# Altium PCB CLP_000.PcbDoc
Units mm, origin at the board's own origin, x right, y up, seen from the top; angles counter-clockwise.
Board outline 135 x 100 mm, 2 copper layers (Top Layer, Bottom Layer); 164 components, 150 nets, 661 pads, 0 vias.
Unrouted connection lines stored in the file: 390.
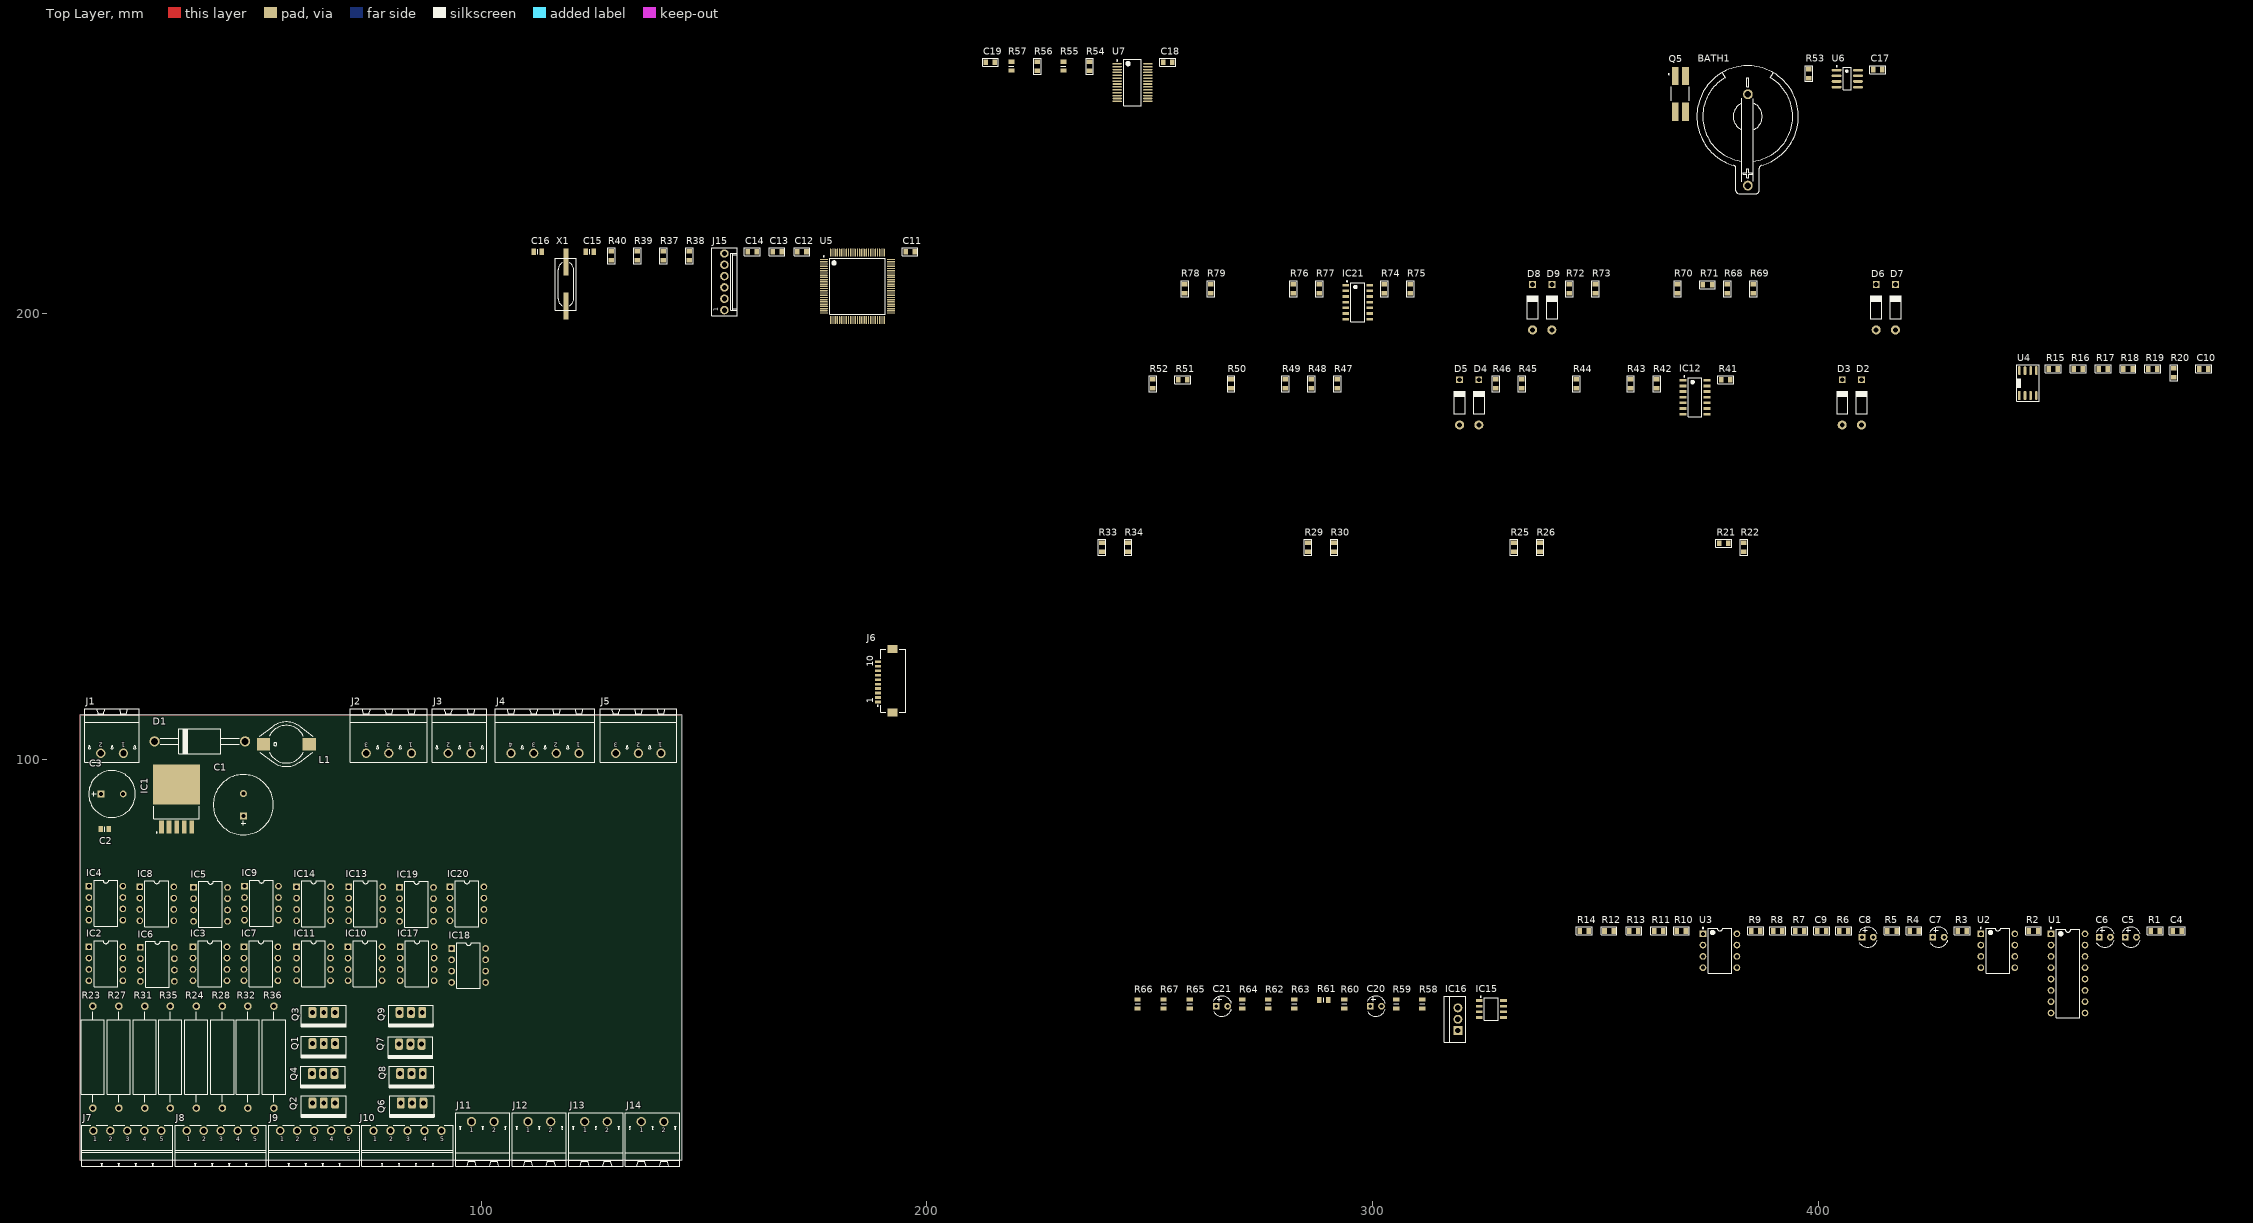
[diagram p0: Top Layer view]
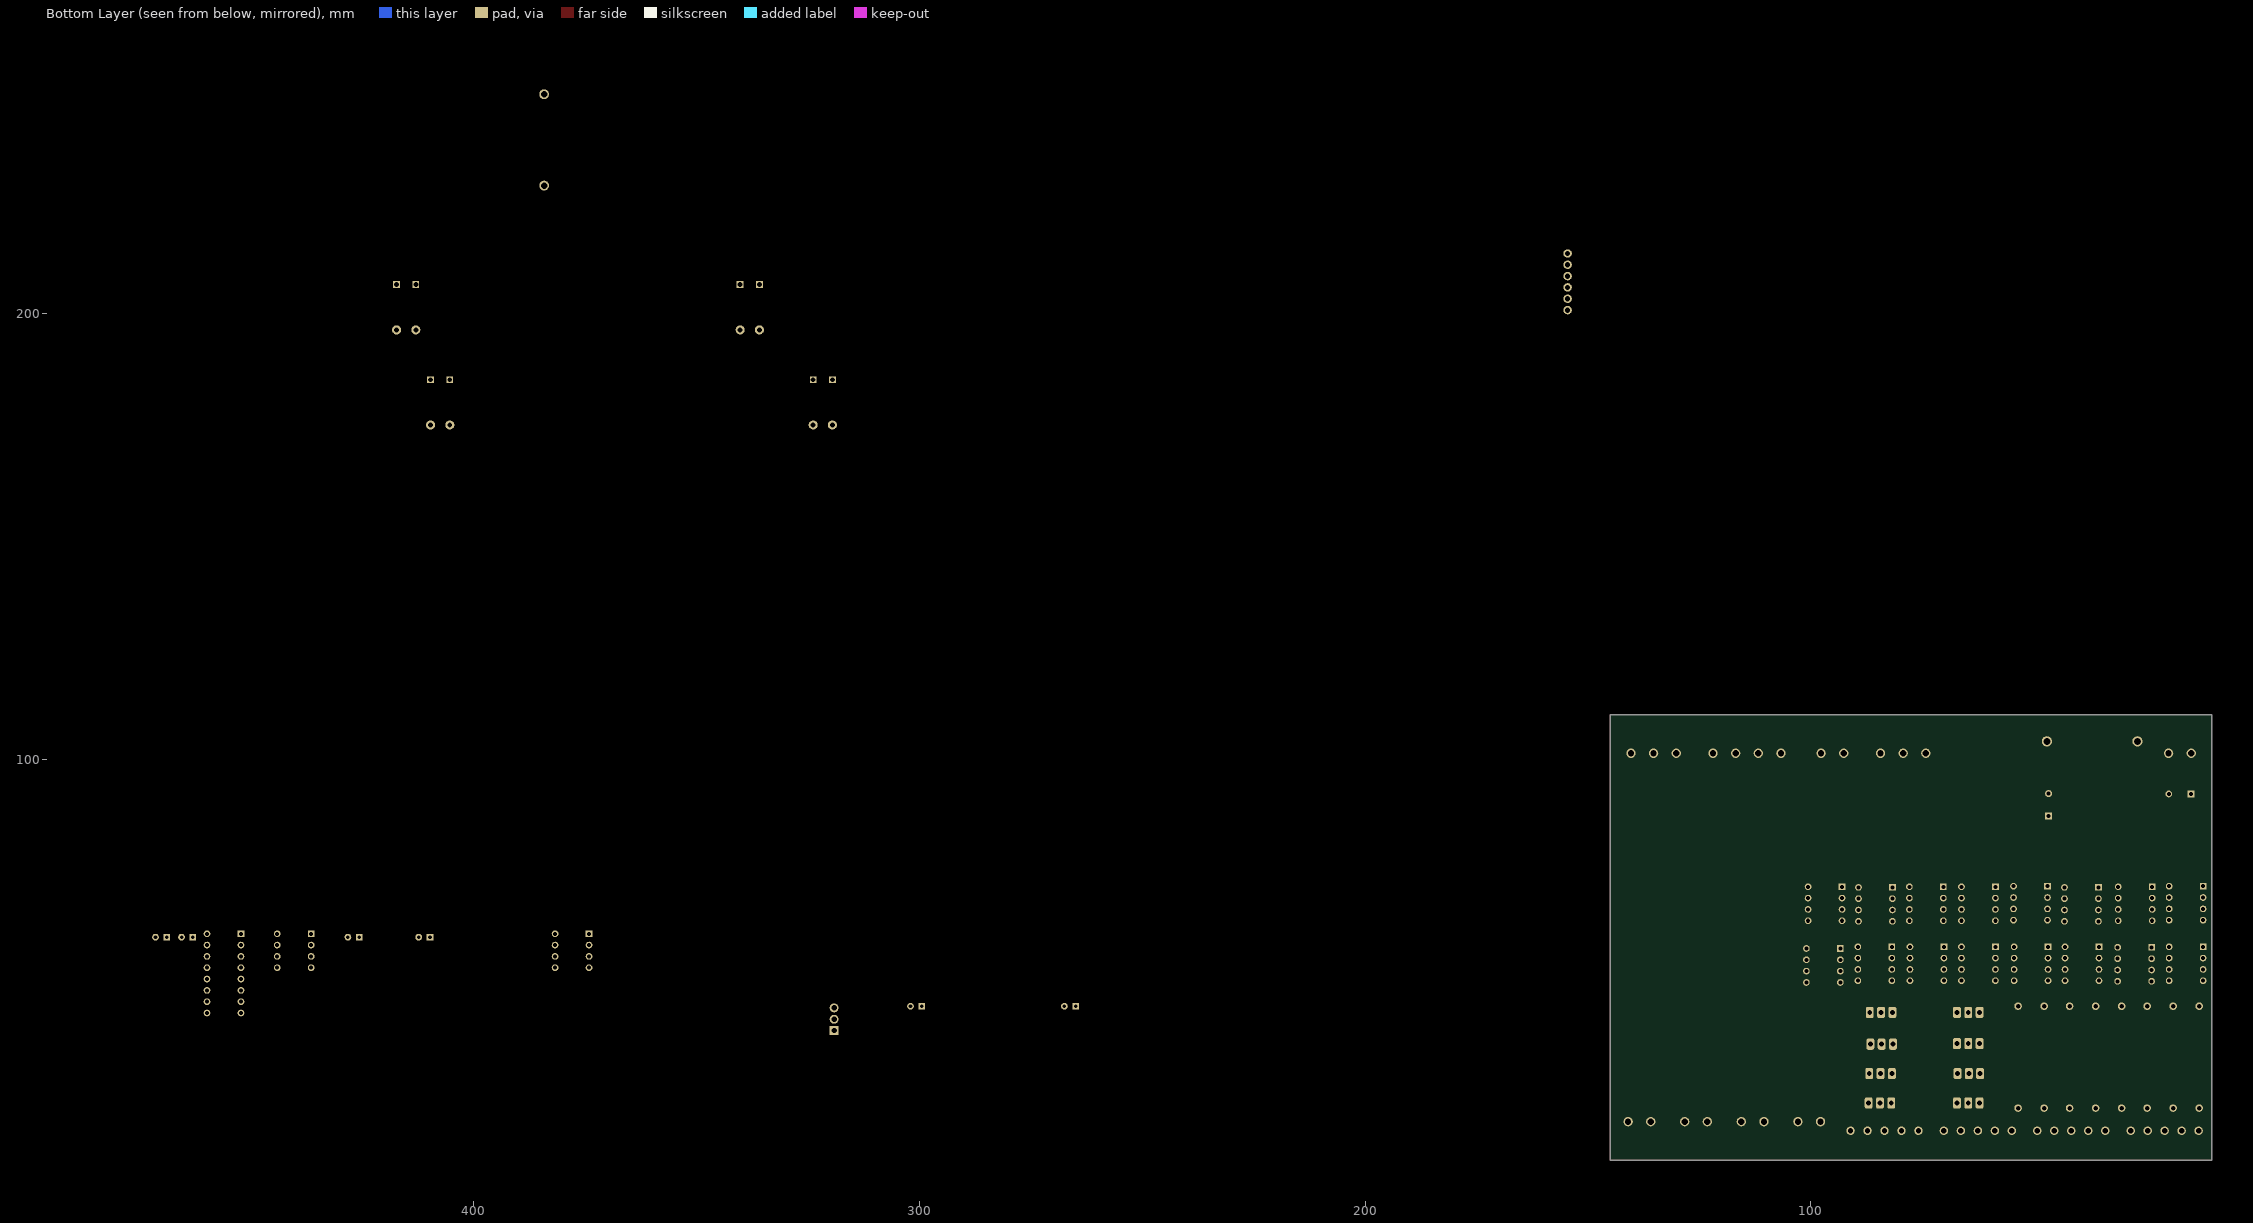
[diagram p1: Bottom Layer view, seen from below]

## Layer stack, top to bottom
Top Layer: signal copper 0.0356
Dielectric: dielectric 0.32, FR-4, Dk 4.8
Bottom Layer: signal copper 0.0356

## Board outline
10,10 145,10 145,110 144.982,109.982 10.033,109.982

## Design rules (kind name [scope] priority, off if disabled: settings)
Clearance [All] p1: gap=0.254
PolygonConnect [All] p1: connectstyle=Relief reliefconductorwidth=0.254 reliefentries=4 polygonreliefangle="90 Angle"
RoomDefinition USB_SERIAL [InComponentClass('USB_SERIAL')] p1: confinementstyle=ConfineIn formatcopy=TRUE lockcomponents=FALSE outline 212.217,246.126 256.667,246.126 256.667,260.096 212.217,260.096
RoomDefinition RTC_ds1307z [InComponentClass('RTC_ds1307z')] p2: confinementstyle=ConfineIn formatcopy=TRUE lockcomponents=FALSE outline 366.014,226.568 416.052,226.568 416.052,258.445 366.014,258.445
RoomDefinition Output_dig [InComponentClass('Output_dig')] p3: confinementstyle=ConfineIn formatcopy=TRUE lockcomponents=FALSE outline 249.555,173.736 411.48,173.736 411.48,188.849 249.555,188.849
RoomDefinition Output_dig2 [InComponentClass('Output_dig2')] p4: confinementstyle=ConfineIn formatcopy=TRUE lockcomponents=FALSE outline 256.667,195.072 419.1,195.072 419.1,210.185 256.667,210.185
RoomDefinition Microcontrolador [InComponentClass('Microcontrolador')] p5: confinementstyle=ConfineIn formatcopy=TRUE lockcomponents=FALSE outline 110.744,197.231 198.374,197.231 198.374,217.551 110.744,217.551
RoomDefinition Input_dig [InComponentClass('Input_dig')] p6: confinementstyle=ConfineIn formatcopy=TRUE lockcomponents=FALSE outline 224.79,124.46 408.305,124.46 408.305,152.146 224.79,152.146
RoomDefinition eeprom24c32 [InComponentClass('eeprom24c32')] p7: confinementstyle=ConfineIn formatcopy=TRUE lockcomponents=FALSE outline 444.246,180.086 489.204,180.086 489.204,191.262 444.246,191.262
RoomDefinition Comu_485 [InComponentClass('Comu_485')] p8: confinementstyle=ConfineIn formatcopy=TRUE lockcomponents=FALSE outline 345.44,41.783 482.6,41.783 482.6,65.151 345.44,65.151
RoomDefinition analog [InComponentClass('analog')] p9: confinementstyle=ConfineIn formatcopy=TRUE lockcomponents=FALSE outline 246.126,36.195 330.581,36.195 330.581,49.657 246.126,49.657
RoutingVias [All] p1: holewidth=0.711 width=1.27 viastyle="Through Hole" minholewidth=0.711 minwidth=1.27 maxholewidth=0.711 maxwidth=1.27
SilkscreenOverComponentPads [All] p1: minsilkscreentomaskgap=0.254
SolderMaskExpansion [All] p1: expansion=0.102
Width [All] p1: maxlimit=0.254 minlimit=0.254 preferedwidth=0.254
27 further rules are at their usual default settings.

## Classes and differential pairs
component class USB_SERIAL: C18 C19 R54 R55 R56 R57 U7
component class RTC_ds1307z: BATH1 C17 Q5 R53 U6
component class Output_dig: D2 D3 D4 D5 IC10 IC11 IC12 IC13 IC14 Q1 Q2 Q3 Q4 R41 R42 R43 R44 R45 R46 R47 R48 R49 R50 R51 R52
component class Output_dig2: D6 D7 D8 D9 IC17 IC18 IC19 IC20 IC21 Q6 Q7 Q8 Q9 R68 R69 R70 R71 R72 R73 R74 R75 R76 R77 R78 R79
component class Microcontrolador: C11 C12 C13 C14 C15 C16 J15 R37 R38 R39 R40 U5 X1
component class Input_dig: IC2 IC3 IC4 IC5 IC6 IC7 IC8 IC9 R21 R22 R23 R24 R25 R26 R27 R28 R29 R30 R31 R32 R33 R34 R35 R36
component class eeprom24c32: C10 R15 R16 R17 R18 R19 R20 U4
component class conn: J1 J2 J3 J4 J5 J6 J7 J8 J9 J10 J11 J12 J13 J14
component class Comu_485: C4 C5 C6 C7 C8 C9 R1 R2 R3 R4 R5 R6 R7 R8 R9 R10 R11 R12 R13 R14 U1 U2 U3
component class analog: C20 C21 IC15 IC16 R58 R59 R60 R61 R62 R63 R64 R65 R66 R67
component class Alimentacao: C1 C2 C3 D1 IC1 L1

## Components (designator, comment, footprint, x,y, rotation, side; value= is the part's Value field where it differs from the comment)
BATH1 "Value" BATH_KEYSTONE_103 384.175,244.221 r90 top
C1 "1000uF" CAPPR500-1350X2200 46.609,89.789 r90 top
C2 "100nF" CAPC2012X135N 15.494,84.328 r180 top
C3 "100uF" CAPPR500-1050X1750 17.145,92.202 r0 top
C4 "100nF" 0805C-TBD 479.806,61.468 r0 top
C5 "1uF" CAPPRB254-450X710 470.154,60.071 r0 top
C6 "1uF" CAPPRB254-450X710 464.312,60.071 r0 top
C7 "1uF" CAPPRB254-450X710 426.974,60.071 r0 top
C8 "1uF" CAPPRB254-450X710 411.099,60.071 r0 top
C9 "100nF" 0805C-TBD 400.05,61.468 r0 top
C10 "100nF" 0805C-TBD 485.775,187.579 r0 top
C11 "100nF" 0805C-TBD 195.453,213.868 r0 top
C12 "100nF" 0805C-TBD 171.196,213.868 r0 top
C13 "100nF" 0805C-TBD 165.608,213.868 r0 top
C14 "100nF" 0805C-TBD 160.02,213.868 r0 top
C15 "22pF" CAPC2012X135N 124.333,213.868 r0 top
C16 "22pF" CAPC2012X135N 112.649,213.868 r0 top
C17 "100nF" 0805C-TBD 412.623,254.762 r0 top
C18 "100nF" 0805C-TBD 253.238,256.413 r0 top
C19 "100nF" 0805C-TBD 213.487,256.413 r0 top
C20 "1uF" CAPPRB254-450X710 300.736,44.577 r0 top
C21 "1uF" CAPPRB254-450X710 266.192,44.577 r0 top
D1 "1N5822" DO-201AD 36.83,104.013 r0 top
D2 "DIODO 1N4007 PF-B1" "DIODO DO41 PF-B1" 409.702,185.166 r0 top
D3 "DIODO 1N4007 PF-B1" "DIODO DO41 PF-B1" 405.384,185.166 r0 top
D4 "DIODO 1N4007 PF-B1" "DIODO DO41 PF-B1" 323.85,185.166 r0 top
D5 "DIODO 1N4007 PF-B1" "DIODO DO41 PF-B1" 319.532,185.166 r0 top
D6 "DIODO 1N4007 PF-B1" "DIODO DO41 PF-B1" 413.004,206.502 r0 top
D7 "DIODO 1N4007 PF-B1" "DIODO DO41 PF-B1" 417.322,206.502 r0 top
D8 "DIODO 1N4007 PF-B1" "DIODO DO41 PF-B1" 335.915,206.502 r0 top
D9 "DIODO 1N4007 PF-B1" "DIODO DO41 PF-B1" 340.233,206.502 r0 top
IC1 "LT1764AEQ-3.3#PBF" TO170P1394X457-6N-R900X1060 31.623,91.059 r90 top
IC2 "HCPL-2601-000E" DIP8-300 15.748,54.102 r0 top
IC3 "HCPL-2601-000E" DIP8-300 39.116,54.102 r0 top
IC4 "HCPL-2601-000E" DIP8-300 15.748,67.691 r0 top
IC5 "HCPL-2601-000E" DIP8-300 39.243,67.437 r0 top
IC6 "HCPL-2601-000E" DIP8-300 27.305,53.975 r0 top
IC7 "HCPL-2601-000E" DIP8-300 50.546,54.102 r0 top
IC8 "HCPL-2601-000E" DIP8-300 27.178,67.564 r0 top
IC9 "HCPL-2601-000E" DIP8-300 50.673,67.691 r0 top
IC10 "HCPL-2601-000E" DIP8-300 73.914,54.102 r0 top
IC11 "HCPL-2601-000E" DIP8-300 62.357,54.102 r0 top
IC12 "SN74LS04D" SOIC127P600X175-14N 372.364,181.229 r0 top
IC13 "HCPL-2601-000E" DIP8-300 74.041,67.564 r0 top
IC14 "HCPL-2601-000E" DIP8-300 62.357,67.564 r0 top
IC15 "LM358AD" SOIC127P600X175-8N 326.644,43.942 r0 top
IC16 "LM7812CT" TO-220-V 319.151,41.656 r90 top
IC17 "HCPL-2601-000E" DIP8-300 85.598,54.102 r0 top
IC18 "HCPL-2601-000E" DIP8-300 97.155,53.721 r0 top
IC19 "HCPL-2601-000E" DIP8-300 85.471,67.437 r0 top
IC20 "HCPL-2601-000E" DIP8-300 96.774,67.564 r0 top
IC21 "SN74LS04D" SOIC127P600X175-14N 296.672,202.565 r0 top
J1 "Family" PHOENIX_1757242 17.145,101.346 r180 top
J2 "Family" PHOENIX_1757255 79.248,101.346 r180 top
J3 "Family" PHOENIX_1757242 95.123,101.346 r180 top
J4 "Family" PHOENIX_1757268 114.3,101.346 r180 top
J5 "Family" PHOENIX_1757255 135.255,101.346 r180 top
J6 "CL586-0541-8" FH12-22(10)SA-1SH 190.627,117.602 r90 top
J7 "Family" PHOENIX_1803303 20.574,16.637 r0 top
J8 "Family" PHOENIX_1803303 41.529,16.637 r0 top
J9 "Family" PHOENIX_1803303 62.484,16.637 r0 top
J10 "Family" PHOENIX_1803303 83.439,16.637 r0 top
J11 "Family" PHOENIX_1757242 100.33,18.669 r0 top
J12 "Family" PHOENIX_1757242 113.03,18.669 r0 top
J13 "Family" PHOENIX_1757242 125.73,18.669 r0 top
J14 "Family" PHOENIX_1757242 138.43,18.669 r0 top
J15 "KK®" MOLEX_22-27-2061 154.559,207.137 r90 top
L1 "100uH" IND_WURTH_WE-PD4_L 56.261,103.378 r0 top
Q1 "TRANSISTOR TIP 122 PF-C2" "TRANSISTOR TO220 PF-C2" 67.183,36.195 r180 top
Q2 "TRANSISTOR TIP 122 PF-C2" "TRANSISTOR TO220 PF-C2" 67.183,22.86 r180 top
Q3 "TRANSISTOR TIP 122 PF-C2" "TRANSISTOR TO220 PF-C2" 67.183,43.18 r180 top
Q4 "TRANSISTOR TIP 122 PF-C2" "TRANSISTOR TO220 PF-C2" 67.056,29.464 r180 top
Q5 "32.768kHz" XTAL_EPSON_MC-406 369.062,249.301 r0 top
Q6 "TRANSISTOR TIP 122 PF-C2" "TRANSISTOR TO220 PF-C2" 86.995,22.86 r180 top
Q7 "TRANSISTOR TIP 122 PF-C2" "TRANSISTOR TO220 PF-C2" 86.614,36.068 r180 top
Q8 "TRANSISTOR TIP 122 PF-C2" "TRANSISTOR TO220 PF-C2" 86.868,29.464 r180 top
Q9 "TRANSISTOR TIP 122 PF-C2" "TRANSISTOR TO220 PF-C2" 86.741,43.18 r180 top
R1 "4K7" 0805R-4K7 474.853,61.468 r0 top
R2 "56" 0805R-56 447.548,61.468 r0 top
R3 "4K7" 0805R-4K7 431.546,61.468 r0 top
R4 "56" 0805R-56 420.751,61.468 r0 top
R5 "4K7" 0805R-4K7 415.798,61.468 r0 top
R6 "56" 0805R-56 405.003,61.468 r0 top
R7 "4K7" 0805R-4K7 395.097,61.468 r0 top
R8 "56" 0805R-56 390.144,61.468 r0 top
R9 "56" 0805R-56 385.191,61.468 r0 top
R10 "56" 0805R-56 368.554,61.468 r0 top
R11 "4K7" 0805R-4K7 363.474,61.468 r0 top
R12 "56" 0805R-56 352.298,61.468 r0 top
R13 "56" 0805R-56 357.886,61.468 r0 top
R14 "4K7" 0805R-4K7 346.71,61.468 r0 top
R15 "0R" 0805R-GENERIC 451.993,187.579 r0 top
R16 "0R" 0805R-GENERIC 457.581,187.579 r0 top
R17 "0R" 0805R-GENERIC 463.169,187.579 r0 top
R18 "0R" 0805R-GENERIC 468.757,187.579 r0 top
R19 "0R" 0805R-GENERIC 474.345,187.579 r0 top
R20 "0R" 0805R-GENERIC 479.806,185.928 r90 top
R21 "330R" 0805R-330 377.825,148.463 r0 top
R22 "330R" 0805R-330 383.286,146.558 r90 top
R23 "4k7" RES2286-1670X520 12.827,33.147 r90 top
R24 "4k7" RES2286-1670X520 36.068,33.147 r90 top
R25 "330R" 0805R-330 331.724,146.558 r90 top
R26 "330R" 0805R-330 337.566,146.558 r90 top
R27 "4k7" RES2286-1670X520 18.669,33.147 r90 top
R28 "4k7" RES2286-1670X520 41.91,33.147 r90 top
R29 "330R" 0805R-330 285.496,146.558 r90 top
R30 "330R" 0805R-330 291.338,146.558 r90 top
R31 "4k7" RES2286-1670X520 24.511,33.147 r90 top
R32 "4k7" RES2286-1670X520 47.625,33.147 r90 top
R33 "330R" 0805R-330 239.268,146.558 r90 top
R34 "330R" 0805R-330 245.11,146.558 r90 top
R35 "4k7" RES2286-1670X520 30.226,33.147 r90 top
R36 "4k7" RES2286-1670X520 53.467,33.147 r90 top
R37 "1K5" 0805R-1K5 140.843,212.217 r90 top
R38 "1K5" 0805R-1K5 146.685,212.217 r90 top
R39 "1K" 0805R-1K 135.001,212.217 r90 top
R40 "10K" 0805R-10K 129.159,211.963 r90 top
R41 "330R" 0805R-330 378.206,185.166 r0 top
R42 "330R" 0805R-330 363.728,183.261 r90 top
R43 "10K" 0805R-10K 357.886,183.261 r90 top
R44 "10K" 0805R-10K 345.694,183.261 r90 top
R45 "10K" 0805R-10K 333.502,183.261 r90 top
R46 "10K" 0805R-10K 327.66,183.261 r90 top
R47 "330R" 0805R-330 292.1,183.261 r90 top
R48 "330R" 0805R-330 286.258,183.261 r90 top
R49 "10K" 0805R-10K 280.416,183.261 r90 top
R50 "10K" 0805R-10K 268.224,183.261 r90 top
R51 "10K" 0805R-10K 256.413,185.166 r0 top
R52 "10K" 0805R-10K 250.698,183.261 r90 top
R53 "0R" 0805R-GENERIC 397.891,253.111 r90 top
R54 "1K" 0805R-1K 236.474,254.762 r90 top
R55 "22" RESC2012X60N 230.632,255.524 r90 top
R56 "1K" 0805R-1K 224.79,254.762 r90 top
R57 "22" RESC2012X60N 218.948,255.524 r90 top
R58 "4k7" RESC2012X60N 311.15,45.085 r90 top
R59 "1k" RESC2012X60N 305.308,45.085 r90 top
R60 "1k" RESC2012X60N 293.624,45.085 r90 top
R61 "4k7" RESC2012X60N 289.052,45.974 r0 top
R62 "10k" RESC2012X60N 276.606,45.085 r90 top
R63 "10k" RESC2012X60N 282.448,45.085 r90 top
R64 "1k" RESC2012X60N 270.764,45.085 r90 top
R65 "1k" RESC2012X60N 258.953,45.085 r90 top
R66 "10k" RESC2012X60N 247.269,45.085 r90 top
R67 "10k" RESC2012X60N 253.111,45.085 r90 top
R68 "330R" 0805R-330 379.603,204.597 r90 top
R69 "330R" 0805R-330 385.445,204.597 r90 top
R70 "10K" 0805R-10K 368.427,204.597 r90 top
R71 "10K" 0805R-10K 374.142,206.502 r0 top
R72 "10K" 0805R-10K 344.17,204.597 r90 top
R73 "10K" 0805R-10K 350.012,204.597 r90 top
R74 "330R" 0805R-330 302.641,204.597 r90 top
R75 "330R" 0805R-330 308.483,204.597 r90 top
R76 "10K" 0805R-10K 282.194,204.597 r90 top
R77 "10K" 0805R-10K 288.036,204.597 r90 top
R78 "10K" 0805R-10K 257.81,204.597 r90 top
R79 "10K" 0805R-10K 263.652,204.597 r90 top
U1 "MAX232ACPE" PE16A 456.057,51.943 r0 top
U2 "SN65HVD20P" P8 440.309,57.023 r0 top
U3 "SN65HVD20P" P8 377.952,57.023 r0 top
U4 "24C32" SO8 445.135,181.61 r90 top
U5 "ATmega2560-16AU" 100A_N 184.404,206.121 r0 top
U6 "DS1307Z" S8-2_N 406.527,252.73 r0 top
U7 "FT232RL-Reel" SSOP-28_N 246.126,251.841 r0 top
X1 "16MC" XTAL-RU49/4 118.999,201.676 r90 top

## Footprints (in the part's own frame and the unit in brackets; to place one, negate y for a bottom-side part, rotate by r counter-clockwise, add the part's x,y. Pads: shape width x height; smd on the part's side, far side on the other; paste and mask are expansions set on the pad)
100A_N [mm] "Thin QFP, 100-Leads, Body 14x14mm, Pitch 0.5mm, IPC Medium Density"
  oval 1.8x0.3 smd: 1(-7.55,6) 2(-7.55,5.5) 3(-7.55,5) 4(-7.55,4.5) 5(-7.55,4) 6(-7.55,3.5) 7(-7.55,3) 8(-7.55,2.5) 9(-7.55,2) 10(-7.55,1.5) 11(-7.55,1) 12(-7.55,0.5) 13(-7.55,0) 14(-7.55,-0.5) 15(-7.55,-1) 16(-7.55,-1.5) 17(-7.55,-2) 18(-7.55,-2.5) 19(-7.55,-3) 20(-7.55,-3.5) 21(-7.55,-4) 22(-7.55,-4.5) 23(-7.55,-5) 24(-7.55,-5.5) 25(-7.55,-6) 51(7.55,-6) 52(7.55,-5.5) 53(7.55,-5) 54(7.55,-4.5) 55(7.55,-4) 56(7.55,-3.5) 57(7.55,-3) 58(7.55,-2.5) 59(7.55,-2) 60(7.55,-1.5) 61(7.55,-1) 62(7.55,-0.5) 63(7.55,0) 64(7.55,0.5) 65(7.55,1) 66(7.55,1.5) 67(7.55,2) 68(7.55,2.5) 69(7.55,3) 70(7.55,3.5) 71(7.55,4) 72(7.55,4.5) 73(7.55,5) 74(7.55,5.5) 75(7.55,6)
  oval 0.3x1.8 smd: 26(-6,-7.55) 27(-5.5,-7.55) 28(-5,-7.55) 29(-4.5,-7.55) 30(-4,-7.55) 31(-3.5,-7.55) 32(-3,-7.55) 33(-2.5,-7.55) 34(-2,-7.55) 35(-1.5,-7.55) 36(-1,-7.55) 37(-0.5,-7.55) 38(0,-7.55) 39(0.5,-7.55) 40(1,-7.55) 41(1.5,-7.55) 42(2,-7.55) 43(2.5,-7.55) 44(3,-7.55) 45(3.5,-7.55) 46(4,-7.55) 47(4.5,-7.55) 48(5,-7.55) 49(5.5,-7.55) 50(6,-7.55) 76(6,7.55) 77(5.5,7.55) 78(5,7.55) 79(4.5,7.55) 80(4,7.55) 81(3.5,7.55) 82(3,7.55) 83(2.5,7.55) 84(2,7.55) 85(1.5,7.55) 86(1,7.55) 87(0.5,7.55) 88(0,7.55) 89(-0.5,7.55) 90(-1,7.55) 91(-1.5,7.55) 92(-2,7.55) 93(-2.5,7.55) 94(-3,7.55) 95(-3.5,7.55) 96(-4,7.55) 97(-4.5,7.55) 98(-5,7.55) 99(-5.5,7.55) 100(-6,7.55)
  silkscreen extent -7.67,-6.25 6.25,6.82, body extent -7,-7 7,7, height 1.2
0805C-TBD [mil] "CAPACITOR 0805"
  rect 40x50 smd: 1(-10,0) 2(70,0)
  silkscreen extent -40,-35 100,35, body extent -11,-25 70,25, height 26
0805R-1K [mil] "RESISTOR 0805"
  rect 40x50 smd: 1(-10,0) 2(70,0)
  silkscreen extent -40,-35 100,35, body extent -11,-25 70,25, height 27
0805R-1K5 [mil] "RESISTOR 0805"
  rect 40x50 smd: 1(-10,0) 2(70,0)
  silkscreen extent -40,-35 100,35, body extent -11,-25 70,25, height 27
0805R-4K7 [mil] "RESISTOR 0805"
  rect 40x50 smd: 1(-10,0) 2(70,0)
  silkscreen extent -40,-35 100,35, body extent -11,-25 70,25, height 27
0805R-10K [mil] "RESISTOR 0805"
  rect 40x50 smd: 1(0,0) 2(80,0)
  silkscreen extent -30,-35 110,35, body extent -1,-25 80,25, height 27
0805R-56 [mil] "RESISTOR 0805"
  rect 40x50 smd: 1(-10,0) 2(70,0)
  silkscreen extent -40,-35 100,35, body extent -11,-25 70,25, height 27
0805R-330 [mil] "RESISTOR 0805"
  rect 40x50 smd: 1(0,0) 2(80,0)
  silkscreen extent -30,-35 110,35, body extent -1,-25 80,25, height 27
0805R-GENERIC [mil] "RESISTOR 0805"
  rect 40x50 smd: 1(-10,0) 2(70,0)
  silkscreen extent -40,-35 100,35, body extent -11,-25 70,25, height 27
BATH_KEYSTONE_103 [mm] "Battery Holder for 20mm Lithium Coin Cells"
  round 2.2 hole 1.5: 1(-15.5,-0.031) 2(5,-0.031)
  silkscreen extent -17.3,-11.4 11.4,11.4, body extent -17.3,-11.39 11.4,11.39, height 8.5
CAPC2012X135N [mm] "Chip Capacitor, Body 2.0x1.25mm, IPC Medium Density"
  rect 1.05x1.4 smd: 1(-0.9,0) 2(0.9,0)
  silkscreen extent 0,-0.58 0,0.58, body extent -1.05,-0.67 1.05,0.68, height 1.25
CAPPR500-1050X1750 [mm] "Capacitor, Radial, Pin spacing 5.0mm - Body Diameter 10.5mm X Body Height 17.5mm"
  rect 1.5x1.5 hole 0.9: 1(-2.5,0)
  round 1.5 hole 0.9: 2(2.5,0)
  silkscreen extent -5.25,-5.25 5.25,5.25, body extent -5.25,-5.23 5.25,5.23, height 17.5
CAPPR500-1350X2200 [mm] "Capacitor, Radial, Pin spacing 5.0mm - Body Diameter 13.5mm X Body Height 22.0mm"
  rect 1.6x1.6 hole 0.9: 1(-2.5,0)
  round 1.6 hole 0.9: 2(2.5,0)
  silkscreen extent -6.75,-6.75 6.75,6.75, body extent -6.75,-6.75 6.75,6.75, height 22.5
CAPPRB254-450X710 [mm] "Capacitor, Polarized Radial Bead, Pin spacing 2.54mm - Body Diameter 4.5mm X Body Height 7.1mm"
  rect 1.5x1.5 hole 0.8: 1(-1.27,0)
  round 1.5 hole 0.8: 2(1.27,0)
  silkscreen extent -1.93,-2.25 2.13,2.25, body extent -2.25,-2.25 2.25,2.25, height 7.08
"DIODO DO41 PF-B1" [mil]
  rect 60x60 hole 43: 1(0,0)
  round 80 hole 43: 2(0,-400)
  silkscreen extent -50,-300 50,-100, body extent -49,-419 52,11, height 104
DIP8-300 [mm] "DIP 8 Leads, Row Spacing 7.62 mm; Pitch 2.54 mm"
  rect 1.5x1.5 hole 0.9: 1(-3.81,3.81)
  round 1.5 hole 0.9: 2(-3.81,1.27) 3(-3.81,-1.27) 4(-3.81,-3.81) 5(3.81,-3.81) 6(3.81,-1.27) 7(3.81,1.27) 8(3.81,3.81)
  silkscreen extent -2.65,-5.15 2.65,5.15, body extent -3.93,-5.08 3.94,5.08, height 5.33
DO-201AD [mm] "DO-201AD, Diode, Axial; Lead Spacing 20.32mm, Lead Dia. 1.3mm, Body Length 9.5mm, Body Dia. 5.6mm"
  round 2.3 hole 1.6: 1(-10.16,0) 2(10.16,0)
  silkscreen extent -8.85,-2.8 8.85,2.8, body extent -10.81,-2.8 10.81,2.8, height 5.6
FH12-22(10)SA-1SH [mm] "Connector; FH12 Series; 10 Position; 1.0mm Spaced Bottom Eccentric Contact"
  rect 0.6x1.3 smd: 1(-4.75,1.625) 2(-3.75,1.625) 3(-2.75,1.625) 4(-1.75,1.625) 5(-0.75,1.625) 6(0.25,1.625) 7(1.25,1.625) 8(2.25,1.625) 9(3.25,1.625) 10(4.25,1.625)
  rect 1.8x2.2 smd: 11(7.15,-1.625) 12(-7.15,-1.625)
  silkscreen extent -7.05,-4.62 7.05,1.75
IND_WURTH_WE-PD4_L [mm] "SMD Power Choke, Width 10mm Body Lenght 12.7mm Height 5.3mm, WURTH WE-PD 4 Serie Type L"
  rect 3x2.8 smd: 1(-5.15,0) 2(5.15,0)
  silkscreen extent -5.95,-5 5.95,5, body extent -6.35,-4.99 6.35,4.99, height 5
MOLEX_22-27-2061 [mm] "2.54mm (.100\") Pitch KK® Header, Single Row, Vertical, 6 Circuits"
  round 1.9 hole 1.2: 1(-6.35,0) 2(-3.81,0) 3(-1.27,0) 4(1.27,0) 5(3.81,0) 6(6.35,0)
  silkscreen extent -7.62,-2.9 7.62,2.9, body extent -7.62,-2.9 7.62,2.9, height 11.7
P8 [mm] "DIP, 8-Leads, Row Spacing 7.62mm, Pitch 2.54mm, Body 9.6x6.4mm"
  rect 1.5x1.5 hole 0.9: 1(-3.81,3.81)
  round 1.5 hole 0.9: 2(-3.81,1.27) 3(-3.81,-1.27) 4(-3.81,-3.81) 5(3.81,-3.81) 6(3.81,-1.27) 7(3.81,1.27) 8(3.81,3.81)
  silkscreen extent -3.93,-5.1 2.65,5.23, body extent -3.3,-5.07 3.3,5.07, height 5.08
PE16A [mm] "DIP, 16-Leads, Row Spacing 7.62mm, Pitch 2.54mm, Body 19.18x6.99mm"
  rect 1.5x1.5 hole 0.9: 1(-3.81,8.89)
  round 1.5 hole 0.9: 2(-3.81,6.35) 3(-3.81,3.81) 4(-3.81,1.27) 5(-3.81,-1.27) 6(-3.81,-3.81) 7(-3.81,-6.35) 8(-3.81,-8.89) 9(3.81,-8.89) 10(3.81,-6.35) 11(3.81,-3.81) 12(3.81,-1.27) 13(3.81,1.27) 14(3.81,3.81) 15(3.81,6.35) 16(3.81,8.89)
  silkscreen extent -3.93,-9.9 2.65,10.31, body extent -3.3,-9.9 3.3,9.9, height 5.08
PHOENIX_1757242 [mm] "PHOENIX MSTBA Serie, Pitch 5.08mm, 12A, 250V, 2 Positions Header"
  round 2.1 hole 1.4: 1(-2.54,0) 2(2.54,0)
  silkscreen extent -6.08,-10 6.08,2, body extent -6.08,-10 6.08,2, height 8.6
PHOENIX_1757255 [mm] "PHOENIX MSTBA Serie, Pitch 5.08mm, 12A, 250V, 3 Positions Header"
  round 2.1 hole 1.4: 1(-5.08,0) 2(0,0) 3(5.08,0)
  silkscreen extent -8.62,-10 8.62,2, body extent -8.62,-10 8.62,2, height 8.6
PHOENIX_1757268 [mm] "PHOENIX MSTBA Serie, Pitch 5.08mm, 12A, 250V, 4 Positions Header"
  round 2.1 hole 1.4: 1(-7.62,0) 2(-2.54,0) 3(2.54,0) 4(7.62,0)
  silkscreen extent -11.16,-10 11.16,2, body extent -11.16,-10 11.16,2, height 8.6
PHOENIX_1803303 [mm] "PHOENIX MC Serie, Pitch 3.81mm, 8A, 160V, 5 Positions Right Angled Header"
  round 1.9 hole 1.2: 1(-7.62,0) 2(-3.81,0) 3(0,0) 4(3.81,0) 5(7.62,0)
  silkscreen extent -10.22,-8 10.22,1.2, body extent -10.22,-8 10.22,1.3, height 7.25
RES2286-1670X520 [mm] "Resistor, Axial, Pad spacing 22.22 mm - Body Lengh 16.7mm X Body Diameter 5.2mm"
  round 1.7 hole 1: 1(-11.43,0) 2(11.43,0)
  silkscreen extent -10.16,-2.6 10.16,2.6, body extent -11.82,-2.6 11.82,2.6, height 5.2
RESC2012X60N [mm] "Chip Resistor, EIA 0805, Metric 2012, Body 2.0x1.2mm, IPC Medium Density"
  rect 0.95x1.4 smd: 1(-1,0) 2(1,0)
  silkscreen extent 0,-0.55 0,0.55, body extent -1.1,-0.67 1.1,0.68, height 0.6
S8-2_N [mm] "SOIC, 8-Leads, Body 4.9x3.9mm, Pitch 1.27mm, IPC Medium Density"
  oval 2.2x0.6 smd: 1(-2.4,1.905) 2(-2.4,0.635) 3(-2.4,-0.635) 4(-2.4,-1.905) 5(2.4,-1.905) 6(2.4,-0.635) 7(2.4,0.635) 8(2.4,1.905)
  silkscreen extent -2.52,-2.5 0.9,2.88, body extent -2,-2.5 2,2.5, height 1.75
SO8 [mil]
  rect 80x24 smd: 1(0,0)
  oval 80x24 smd: 2(0,-50) 3(0,-100) 4(0,-150) 5(220,-150) 6(220,-100) 7(220,-50) 8(220,0)
  silkscreen extent -50,-175 270,25, body extent -5,-172 222,22, height 57
SOIC127P600X175-8N [mm] "SOIC 8, Pitch 1.27mm - Body 4x5mm, IPC Medium Density"
  rect 1.55x0.6 smd: 1(-2.7,1.905) 2(-2.7,0.635) 3(-2.7,-0.635) 4(-2.7,-1.905) 5(2.7,-1.905) 6(2.7,-0.635) 7(2.7,0.635) 8(2.7,1.905)
  silkscreen extent -2.52,-2.5 1.55,2.88, body extent -3.1,-2.5 3.1,2.5, height 1.75
SOIC127P600X175-14N [mm] "SOIC 14, Pitch 1.27mm - Body 4x8.75mm, IPC Medium Density"
  rect 1.55x0.6 smd: 1(-2.7,3.81) 2(-2.7,2.54) 3(-2.7,1.27) 4(-2.7,0) 5(-2.7,-1.27) 6(-2.7,-2.54) 7(-2.7,-3.81) 8(2.7,-3.81) 9(2.7,-2.54) 10(2.7,-1.27) 11(2.7,0) 12(2.7,1.27) 13(2.7,2.54) 14(2.7,3.81)
  silkscreen extent -2.52,-4.4 1.55,4.78, body extent -3.1,-4.37 3.1,4.38, height 1.75
SSOP-28_N [mm] "SOP, 28-Leads, Body 10.2x5.3mm, Pitch 0.65mm, IPC Medium Density"
  oval 2.1x0.35 smd: 1(-3.45,4.225) 2(-3.45,3.575) 3(-3.45,2.925) 4(-3.45,2.275) 5(-3.45,1.625) 6(-3.45,0.975) 7(-3.45,0.325) 8(-3.45,-0.325) 9(-3.45,-0.975) 10(-3.45,-1.625) 11(-3.45,-2.275) 12(-3.45,-2.925) 13(-3.45,-3.575) 14(-3.45,-4.225) 15(3.45,-4.225) 16(3.45,-3.575) 17(3.45,-2.925) 18(3.45,-2.275) 19(3.45,-1.625) 20(3.45,-0.975) 21(3.45,-0.325) 22(3.45,0.325) 23(3.45,0.975) 24(3.45,1.625) 25(3.45,2.275) 26(3.45,2.925) 27(3.45,3.575) 28(3.45,4.225)
  silkscreen extent -3.57,-5.25 2,5.25, body extent -2.8,-5.25 2.8,5.25, height 2
TO170P1394X457-6N-R900X1060 [mm] "TO, 1.70mm Pitch; 5 Pin, 13.945mm L X 8.89mm W X 4.572mm H body, IPC Medium Density"
  rect 2.95x1.05 smd: 1(-6.3,3.4) 2(-6.3,1.7) 3(-6.3,0) 4(-6.3,-1.7) 5(-6.3,-3.4)
  rect 9x10.6 smd: 6(3.25,0)
  silkscreen extent -7.62,-5.1 -1.6,5.1, body extent -6.93,-5.27 7.11,5.27, height 4.63
TO-220-V [mm] "TO-220 3-Terminal - Vertical Mount"
  rect 2x2 hole 1.2: 1(-2.54,0)
  round 2 hole 1.2: 2(0,0) 3(2.54,0)
  silkscreen extent -5.21,-1.78 5.21,3.05, body extent -5.27,-1.75 5.27,2.95, height 20.5
"TRANSISTOR TO220 PF-C2" [mil]
  rrect50% 70x100 hole 43: 1(0,0) 2(100,0) 3(200,0)
  silkscreen extent -100,-63 300,125, body extent -100,-55 300,125, height 726
XTAL-RU49/4 [mil]
  rect 240x47.24 smd: 1(0,0) 2(390,0)
  silkscreen extent -35,-90 425,95, body extent -78,-90 468,95, height 120
XTAL_EPSON_MC-406 [mm] "EPSON Crystal; 10.41mm L X 4.06mm W X 3.6mm H"
  rect 1.52x4.1 smd: 1(-1.16,4) 2(-1.16,-4) 3(1.16,-4) 4(1.16,4)
  silkscreen extent -2.7,-1.55 2.03,4.57, body extent -2.03,-5.4 2.03,5.41, height 3.6

## Part data
BATH1: library part BATH_KEYSTONE_103, "Battery Holder whit 2 Pin"
C1: library part CAER_1000UF_35V_20%_VISHAY_MAL203850102E3, "Polarised capacitor"
C2: library part CC0805_100NF_50V_10%_X7R, "Non-polarised capacitor"
C3: library part CAER_100UF_63V_20%_500-1050X1750_LESR0R190, "Polarised capacitor"
C4 C9 C10 C11 C12 C13 C14 C17 C18 C19: library part 0805C-100nF-25V-X7R-MUR, "CAPACITOR 0805 CERAMIC"
C5 C6 C7 C8 C20 C21: library part CTEB_1UF_35V_10%_254-450X710, "Polarised capacitor"
C15 C16: library part CC0805_22PF_50V_5%_NP0, "Non-polarised capacitor"
D1: "Schottky Diode"
IC1: "3A, Fast Transient Response, Low Noise, LDO Regulators"
IC2 IC3 IC4 IC5 IC6 IC7 IC8 IC9 IC10 IC11 IC13 IC14 IC17 IC18 IC19 IC20: "Single Optocoupler"
IC12 IC21: "Hex Inverter"
IC15: "Dual Operational Amplifier"
IC16: library part LM7812CT_v, "3-Terminal Regulator 1=IN 2=GND 3=OUT"
J1 J3 J11 J12 J13 J14: library part PHOENIX_1757242, "Connector 2 Male"
J2 J5: library part PHOENIX_1757255, "Connector 3 Male"
J4: library part PHOENIX_1757268, "Connector 4 Male"
J6: "FH12 Series, \"Flip-Lock\" SMT/ZIF FFC/FPC Connector - 1.0mm Spaced Bottom Eccentric Contact"
J7 J8 J9 J10: library part PHOENIX_1803303, "Connector 5 Male"
J15: library part MOLEX_22-27-2061, "Connector 6 Male"
L1: library part IND_3.3UH_20%_WURTH_WE-PD4_74456033, "Inductor With Magnetic core"
Q5: library part "XTAL_32.768KHZ_EPSON_MC-406 32.768K-A3:ROHS", "Crystal 4 pins 1=XTAL Control 2 And 3=NC 4=XTAL"
R1 R3 R5 R7 R11 R14: library part 0805R-4K7, "RESISTOR 0805 1/4 WATT THIN FILM"
R2 R4 R6 R8 R9 R10 R12 R13: library part 0805R-56, "RESISTOR 0805 1/4 WATT THIN FILM"
R15 R16 R17 R18 R19 R20 R53: library part 0805R-0R, "RESISTOR 0805 1 WATT"
R21 R22 R25 R26 R29 R30 R33 R34 R41 R42 R47 R48 R68 R69 R74 R75: library part 0805R-330, "RESISTOR 0805 1/4 WATT THIN FILM"
R23 R24 R27 R28 R31 R32 R35 R36: library part RMF_4K7_5%_3W_250PPM_2286-1670X520, "Resistor - 5%"
R37 R38: library part 0805R-1K5, "RESISTOR 0805 1/4 WATT THIN FILM"
R39 R54 R56: library part 0805R-1K, "RESISTOR 0805 1/4 WATT THIN FILM"
R40 R43 R44 R45 R46 R49 R50 R51 R52 R70 R71 R72 R73 R76 R77 R78 R79: library part 0805R-10K, "RESISTOR 0805 1/4 WATT THIN FILM"
R55 R57: library part R0805_22R_1%_0.125W_100PPM, "Resistor - 1%"
R58 R61: library part R0805_4K7_1%_0.125W_100PPM, "Resistor - 1%"
R59 R60 R64 R65: library part R0805_1K_1%_0.33W_100PPM_VISHAY_CRCW-HP, "Resistor - 1%"
R62 R63 R66 R67: library part R0805_10K_0.1%_0.1W_10PPM, "Resistor - 0.1%"
U1: "+5V Powered, Multi-Channel RS-232 Driver/Receiver"
U2 U3: "Extended Common-mode RS-485 Transceiver, 25 Mbps, 5 V, Half Duplex, -40 to 85 degC, 8-pin PDIP (P), Pb-Free (RoHS)"
U4: "I2C EEPROM 4K X 8"
U5: "8-bit AVR Microcontroller, 4.5-5.5V, 16MHz, 256KB Flash, 4KB EEPROM, 8KB SRAM, 86 GPIO pins, 100-pin TQFP, Industrial Grade (-40°C to 85°C), Pb-Free"
U6: "64 x 8, Serial, I2C Real-Time Clock, 5.0V, 8-Pin SO, 0 to 70 degC"
U7: "USB UART Asynchronous Serial Data Transfer Chip, 28-pin SSOP, Tape and Reel"
X1: library part 16MC-HC49US, "16MHZ CRSYTAL HC49US"

## Nets (pads, with @x,y where several pads share a name; then routed paths per layer and width w, separated by ;. In a path a pad name is that pad's centre, name@x,y a point inside that pad or via, vN(x,y) a via of type N, cw(c..) or ccw(c..) an arc to the next point about the centre after c; other vN are vias at no path point)
5V: C1.1 C4.1 C5.2 C9.1 C10.1 C11.1 C12.1 C13.1 C14.1 C17.1 C18.1 IC1.4 IC2.7 IC2.8 IC3.7 IC3.8 IC4.7 IC4.8 IC5.7 IC5.8 IC6.7 IC6.8 IC7.7 IC7.8 IC8.7 IC8.8 IC9.7 IC9.8 IC10.7 IC10.8 IC11.7 IC11.8 IC13.7 IC13.8 IC14.7 IC14.8 IC17.7 IC17.8 IC18.7 IC18.8 IC19.7 IC19.8 IC20.7 IC20.8 J4.4 J6.2 J15.2 L1.2 R1.1 R7.1 R18.2 R19.2 R20.2 R21.1 R22.1 R25.1 R26.1 R29.1 R30.1 R33.1 R34.1 R37.1 R38.1 R40.1 R41.1 R42.1 R47.1 R48.1 R68.1 R69.1 R74.1 R75.1 U1.16 U2.8 U3.8 U4.8 U5.10 U5.31 U5.61 U5.80 U5.100 U6.8 U7.4 U7.20
12V: IC16.3
24V: C2.2 C3.1 D2.1 D3.1 D4.1 D5.1 D6.1 D7.1 D8.1 D9.1 IC1.1 IC16.1 J1.2 J9.1 J10.1
GND: BATH1.2 C1.2 C2.1 C3.2 C4.2 C8.1 C9.2 C10.2 C11.2 C12.2 C13.2 C14.2 C15.1 C16.1 C17.2 C18.2 C20.2 C21.2 D1.2 IC1.3 IC1.5 IC2.5 IC3.5 IC4.5 IC5.5 IC6.5 IC7.5 IC8.5 IC9.5 IC10.3 IC10.5 IC11.3 IC11.5 IC12.7 IC13.3 IC13.5 IC14.3 IC14.5 IC16.2 IC17.3 IC17.5 IC18.3 IC18.5 IC19.3 IC19.5 IC20.3 IC20.5 IC21.7 J1.1 J2.1 J4.1 J5.1 J6.9 J6.10 J6.11 J6.12 J7.1 J8.1 J11.1 J12.1 J13.1 J14.1 J15.1 Q1.3 Q2.3 Q3.3 Q4.3 Q6.3 Q7.3 Q8.3 Q9.3 R5.2 R14.2 R15.2 R16.2 R17.2 R60.1 R65.1 R66.1 R67.1 U1.15 U2.5 U3.5 U4.4 U4.7 U5.11 U5.32 U5.62 U5.81 U5.99 U6.4 U7.7 U7.18 U7.21 U7.25 U7.26
GND_2: IC2.3 IC3.3 IC4.3 IC5.3 IC6.3 IC7.3 IC8.3 IC9.3
NetBATH1_1: BATH1.1 R53.1
NetC5_1: C5.1 U1.2
NetC6_1: C6.1 U1.1
NetC6_2: C6.2 U1.3
NetC7_1: C7.1 U1.4
NetC7_2: C7.2 U1.5
NetC8_2: C8.2 U1.6
NetC15_2: C15.2 U5.34 X1.1
NetC16_2: C16.2 U5.33 X1.2
NetC19_1: C19.1 U7.2
NetC19_2: C19.2 J15.3 R39.1
NetC20_1: C20.1 IC15.3 R58.2
NetC21_1: C21.1 IC15.5 R61.2
NetD1_1: D1.1 IC1.2 L1.1
NetD2_2: D2.2 J9.4 Q1.2
NetD3_2: D3.2 J9.2 Q2.2
NetD4_2: D4.2 J9.5 Q3.2
NetD5_2: D5.2 J9.3 Q4.2
NetD6_2: D6.2 J10.2 Q6.2
NetD7_2: D7.2 J10.4 Q7.2
NetD8_2: D8.2 J10.3 Q8.2
NetD9_2: D9.2 J10.5 Q9.2
NetIC2_2: IC2.2 R23.2
NetIC2_6: IC2.6 R21.2 U5.51
NetIC3_2: IC3.2 R24.2
NetIC3_6: IC3.6 R22.2 U5.55
NetIC4_2: IC4.2 R27.2
NetIC4_6: IC4.6 R25.2 U5.52
NetIC5_2: IC5.2 R28.2
NetIC5_6: IC5.6 R26.2 U5.56
NetIC6_2: IC6.2 R31.2
NetIC6_6: IC6.6 R29.2 U5.53
NetIC7_2: IC7.2 R32.2
NetIC7_6: IC7.6 R30.2 U5.57
NetIC8_2: IC8.2 R35.2
NetIC8_6: IC8.6 R33.2 U5.54
NetIC9_2: IC9.2 R36.2
NetIC9_6: IC9.6 R34.2 U5.58
NetIC10_2: IC10.2 R43.2
NetIC10_6: IC10.6 R41.2 R45.1
NetIC11_2: IC11.2 R44.2
NetIC11_6: IC11.6 R42.2 R46.1
NetIC12_1: IC12.1 U5.71
NetIC12_2: IC12.2 R43.1
NetIC12_3: IC12.3 U5.59
NetIC12_4: IC12.4 R44.1
NetIC12_5: IC12.5 U5.72
NetIC12_6: IC12.6 R49.1
NetIC12_8: IC12.8 R50.1
NetIC12_9: IC12.9 U5.60
NetIC12_10: IC12.10 R70.1
NetIC12_11: IC12.11 U5.73
NetIC12_12: IC12.12 R71.1
NetIC12_13: IC12.13 U5.75
NetIC13_2: IC13.2 R49.2
NetIC13_6: IC13.6 R47.2 R51.1
NetIC14_2: IC14.2 R50.2
NetIC14_6: IC14.6 R48.2 R52.1
NetIC15_1: IC15.1 J11.2
NetIC15_2: IC15.2 R59.1 R60.2
NetIC15_6: IC15.6 R64.1 R65.2
NetIC15_7: IC15.7 J12.2
NetIC17_2: IC17.2 R70.2
NetIC17_6: IC17.6 R68.2 R72.1
NetIC18_2: IC18.2 R71.2
NetIC18_6: IC18.6 R69.2 R73.1
NetIC19_2: IC19.2 R76.2
NetIC19_6: IC19.6 R74.2 R78.1
NetIC20_2: IC20.2 R77.2
NetIC20_6: IC20.6 R75.2 R79.1
NetIC21_1: IC21.1 U5.74
NetIC21_2: IC21.2 R76.1
NetIC21_3: IC21.3 U5.76
NetIC21_4: IC21.4 R77.1
NetJ2_2: J2.2 U1.13
NetJ2_3: J2.3 U1.14
NetJ3_1: J3.1 R4.2
NetJ3_2: J3.2 R2.2
NetJ4_2: J4.2 R12.2
NetJ4_3: J4.3 R9.2
NetJ5_2: J5.2 R57.1
NetJ5_3: J5.3 R55.1
NetJ6_1: J6.1 J6.3
NetJ6_5: J6.5 R8.2
NetJ6_6: J6.6 R13.2
NetJ6_7: J6.7 U5.50
NetJ7_2: J7.2 R23.1
NetJ7_3: J7.3 R27.1
NetJ7_4: J7.4 R31.1
NetJ7_5: J7.5 R35.1
NetJ8_2: J8.2 R24.1
NetJ8_3: J8.3 R28.1
NetJ8_4: J8.4 R32.1
NetJ8_5: J8.5 R36.1
NetJ13_2: J13.2 R62.2
NetJ14_2: J14.2 R63.2
NetJ15_4: J15.4 U5.22
NetJ15_5: J15.5 U5.21
NetJ15_6: J15.6 U5.20
NetQ1_1: Q1.1 R45.2
NetQ2_1: Q2.1 R46.2
NetQ3_1: Q3.1 R51.2
NetQ4_1: Q4.1 R52.2
NetQ5_1: Q5.1 U6.1
NetQ5_4: Q5.4 U6.2
NetQ6_1: Q6.1 R72.2
NetQ7_1: Q7.1 R73.2
NetQ8_1: Q8.1 R78.2
NetQ9_1: Q9.1 R79.2
NetR1_2: R1.2 R3.1
NetR2_1: R2.1 U2.6
NetR3_2: R3.2 R5.1
NetR4_1: R4.1 U2.7
NetR6_1: R6.1 R8.1 U5.46
NetR6_2: R6.2 U1.11
NetR7_2: R7.2 R11.1
NetR9_1: R9.1 U3.6
NetR10_1: R10.1 R10.2 R13.1 U1.12
NetR11_2: R11.2 R14.1
NetR12_1: R12.1 U3.7
NetR15_1: R15.1 R18.1 U4.1
NetR16_1: R16.1 R19.1 U4.2
NetR17_1: R17.1 R20.1 U4.3
NetR37_2: R37.2 U4.6 U5.43 U6.6
NetR38_2: R38.2 U4.5 U5.44 U6.5
NetR39_2: R39.2 R40.2 U5.30
NetR53_2: R53.2 U6.3
NetR54_1: R54.1 U7.1
NetR54_2: R54.2 U5.2
NetR55_2: R55.2 U7.16
NetR56_1: R56.1 U7.5
NetR56_2: R56.2 U5.3
NetR57_2: R57.2 U7.15
NetR58_1: R58.1 U5.77
NetR61_1: R61.1 U5.78
NetR62_1: R62.1 R66.2 U5.82
NetR63_1: R63.1 R67.2 U5.83
NetU2_1: U2.1 U5.12
NetU2_2: U2.2 U2.3 U5.15
NetU2_4: U2.4 U5.13
NetU3_1: U3.1 U5.63
NetU3_2: U3.2 U3.3 U5.70
NetU3_4: U3.4 U5.64
NetU5_45: U5.45
VCC: IC12.14 IC21.14
pads on no net: IC1.6 IC2.1 IC2.4 IC3.1 IC3.4 IC4.1 IC4.4 IC5.1 IC5.4 IC6.1 IC6.4 IC7.1 IC7.4 IC8.1 IC8.4 IC9.1 IC9.4 IC10.1 IC10.4 IC11.1 IC11.4 IC13.1 IC13.4 IC14.1 IC14.4 IC15.4 IC15.8 IC17.1 IC17.4 IC18.1 IC18.4 IC19.1 IC19.4 IC20.1 IC20.4 IC21.5 IC21.6 IC21.8 IC21.9 IC21.10 IC21.11 IC21.12 IC21.13 J6.4 J6.8 Q5.2 Q5.3 R59.2 R64.2 U1.7 U1.8 U1.9 U1.10 U5.1 U5.4 U5.5 U5.6 U5.7 U5.8 U5.9 U5.14 U5.16 U5.17 U5.18 U5.19 U5.23 U5.24 U5.25 U5.26 U5.27 U5.28 U5.29 U5.35 U5.36 U5.37 U5.38 U5.39 U5.40 U5.41 U5.42 U5.47 U5.48 U5.49 U5.65 U5.66 U5.67 U5.68 U5.69 U5.79 U5.84 U5.85 U5.86 U5.87 U5.88 U5.89 U5.90 U5.91 U5.92 U5.93 U5.94 U5.95 U5.96 U5.97 U5.98 U6.7 U7.3 U7.6 U7.8 U7.9 U7.10 U7.11 U7.12 U7.13 U7.14 U7.17 U7.19 U7.22 U7.23 U7.24 U7.27 U7.28
copper on no net: | length 470
  Top Layer w0.254: 10,10 10,110 145,110 145,10 10,10

## Text inside footprints (layer, text, board x,y; h text height)
J1: Top Overlay "2" at 15.045,103.746 h1 r180; Top Overlay "1" at 20.045,103.746 h1 r180
J2: Top Overlay "1" at 84.608,103.746 h1 r180; Top Overlay "2" at 79.608,103.746 h1 r180; Top Overlay "3" at 74.608,103.746 h1 r180
J3: Top Overlay "2" at 93.023,103.746 h1 r180; Top Overlay "1" at 98.023,103.746 h1 r180
J4: Top Overlay "3" at 112.2,103.746 h1 r180; Top Overlay "2" at 117.2,103.746 h1 r180; Top Overlay "1" at 122.2,103.746 h1 r180; Top Overlay "4" at 107,103.746 h1 r180
J5: Top Overlay "1" at 140.615,103.746 h1 r180; Top Overlay "2" at 135.615,103.746 h1 r180; Top Overlay "3" at 130.615,103.746 h1 r180
J6: Top Overlay "1" at 187.902,112.602 h1.5 r90; Top Overlay "10" at 187.902,120.752 h1.5 r90
J7: Top Overlay "1" at 12.938,14.287 h1; Top Overlay "2" at 16.448,14.287 h1; Top Overlay "3" at 20.258,14.287 h1; Top Overlay "4" at 24.068,14.287 h1; Top Overlay "5" at 27.878,14.287 h1
J8: Top Overlay "1" at 33.893,14.287 h1; Top Overlay "2" at 37.403,14.287 h1; Top Overlay "3" at 41.213,14.287 h1; Top Overlay "4" at 45.023,14.287 h1; Top Overlay "5" at 48.833,14.287 h1
J9: Top Overlay "1" at 54.848,14.287 h1; Top Overlay "2" at 58.358,14.287 h1; Top Overlay "3" at 62.168,14.287 h1; Top Overlay "4" at 65.978,14.287 h1; Top Overlay "5" at 69.788,14.287 h1
J10: Top Overlay "1" at 75.803,14.287 h1; Top Overlay "2" at 79.313,14.287 h1; Top Overlay "3" at 83.123,14.287 h1; Top Overlay "4" at 86.933,14.287 h1; Top Overlay "5" at 90.743,14.287 h1
J11: Top Overlay "2" at 102.43,16.269 h1; Top Overlay "1" at 97.43,16.269 h1
J12: Top Overlay "2" at 115.13,16.269 h1; Top Overlay "1" at 110.13,16.269 h1
J13: Top Overlay "2" at 127.83,16.269 h1; Top Overlay "1" at 122.83,16.269 h1
J14: Top Overlay "2" at 140.53,16.269 h1; Top Overlay "1" at 135.53,16.269 h1
J15: Top Overlay "1" at 153.164,200.567 h1 r90; Mechanical 14 "1" at 153.164,200.567 h1 r90